# Altium PCB PWR_REG_LED_PCB.PcbDoc
Units mil, origin at the board's own origin, x right, y up, seen from the top; angles counter-clockwise.
Board outline 2700 x 2100 mil, 2 copper layers (Top Layer, Bottom Layer), stack 62.8 mil thick; 15 components, 31 nets, 62 pads, 18 vias.
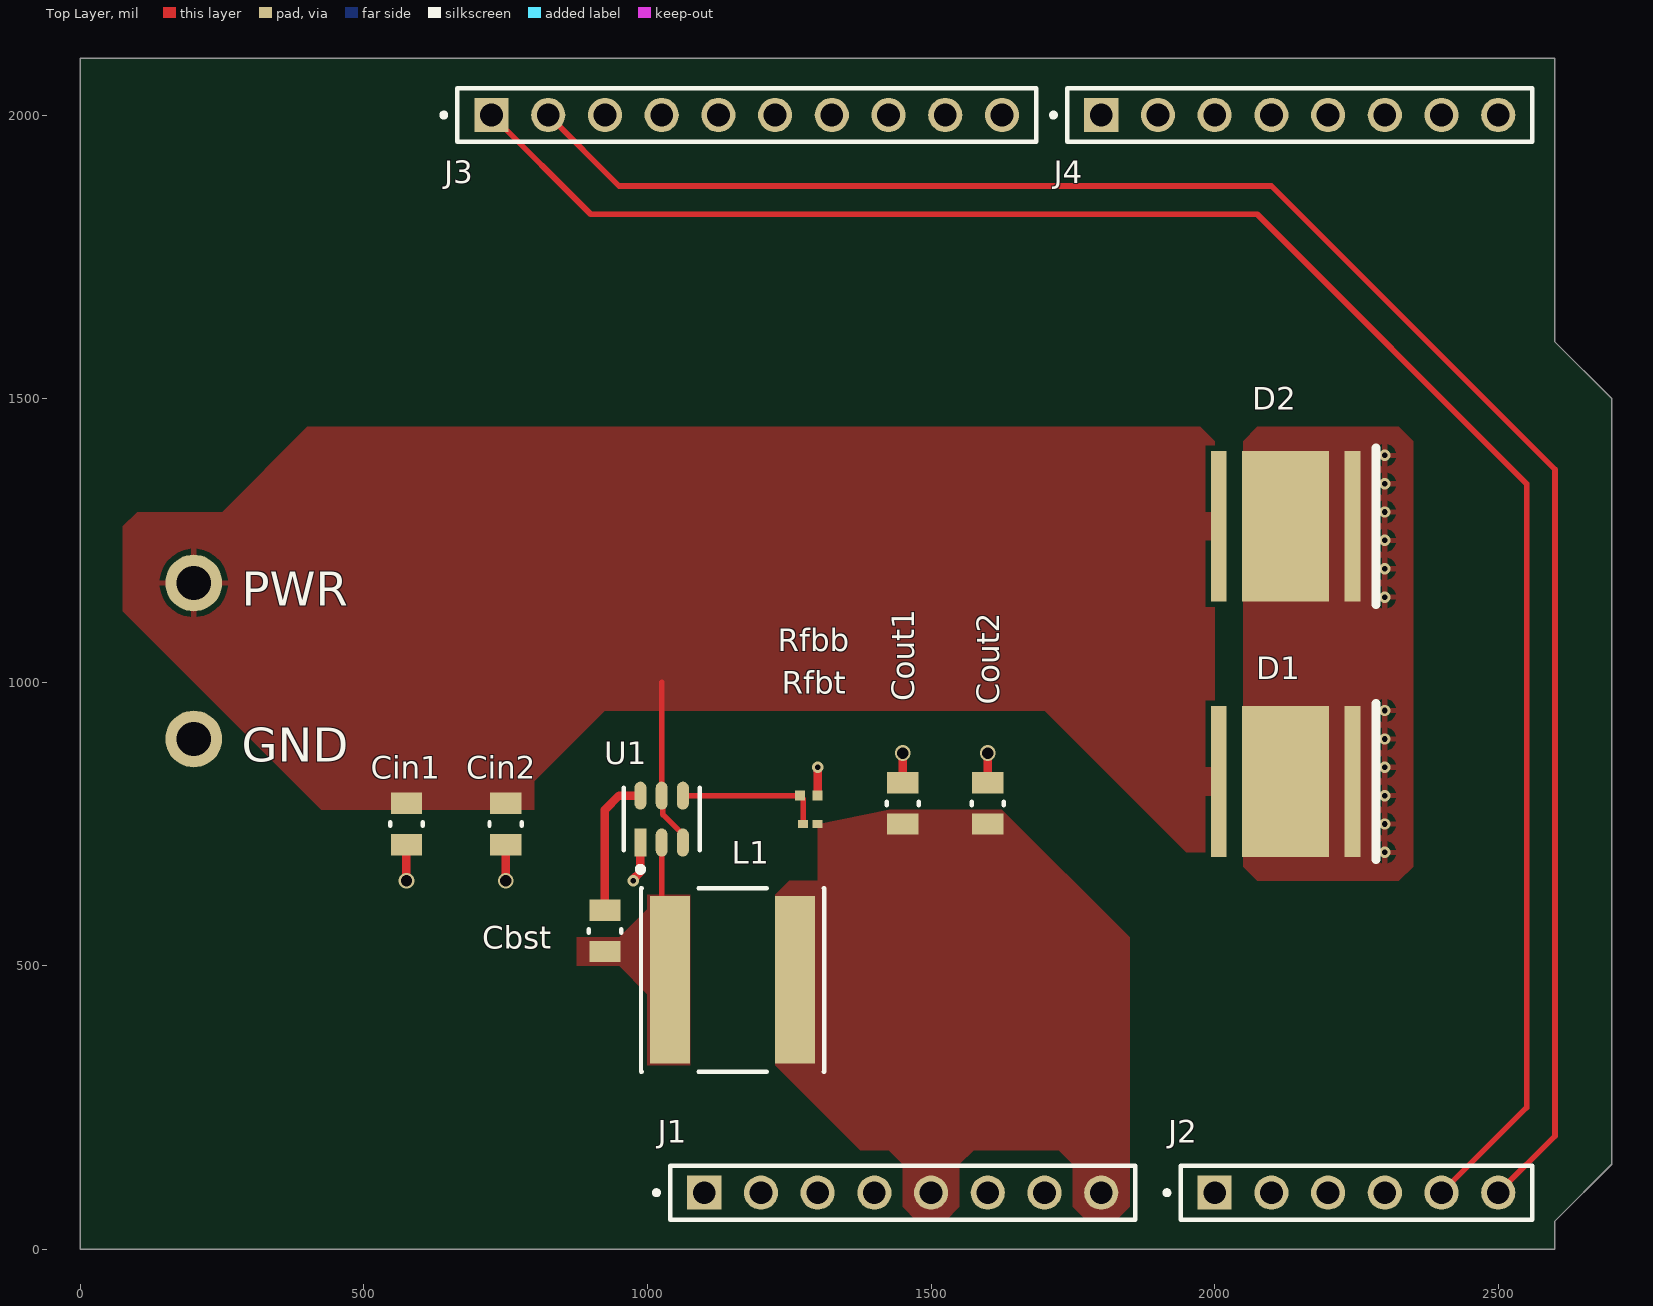
[diagram p0: Top Layer view]
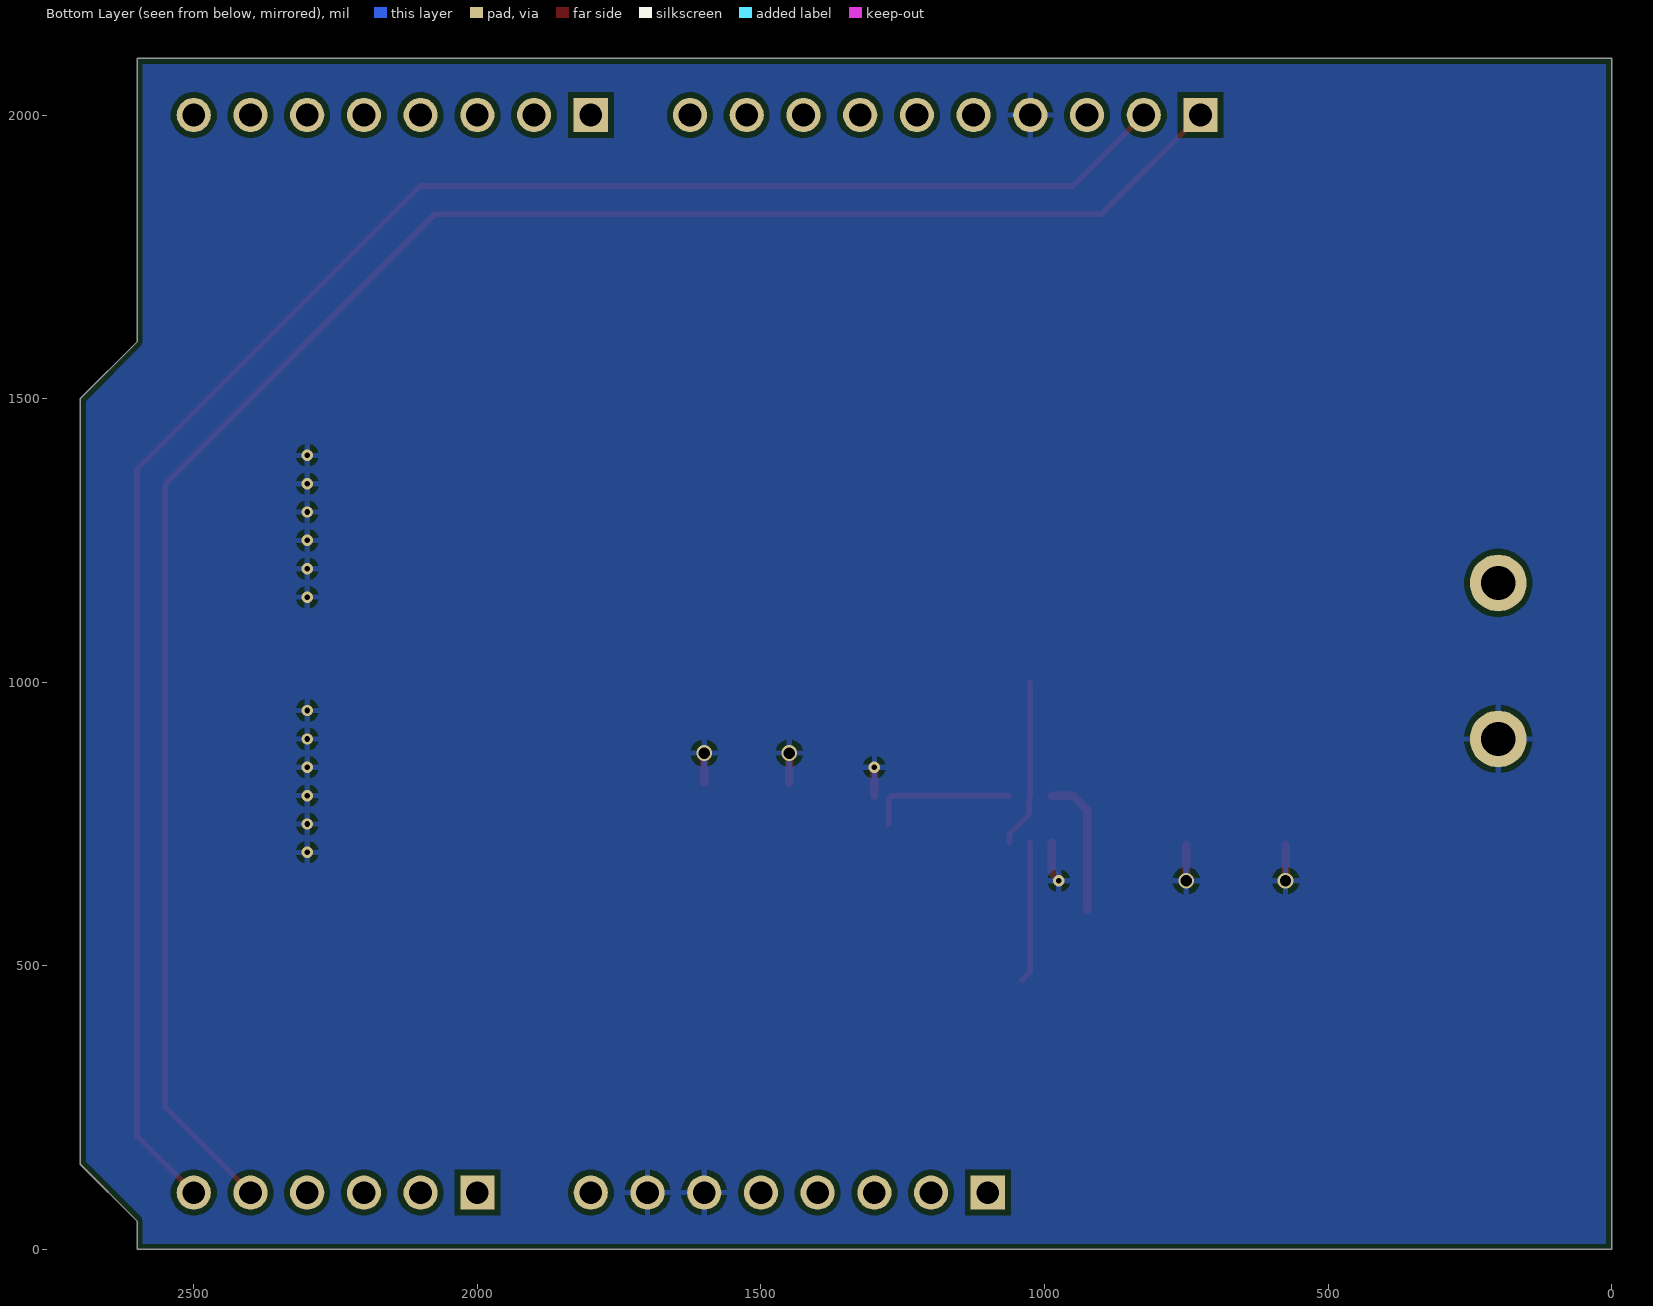
[diagram p1: Bottom Layer view, seen from below]
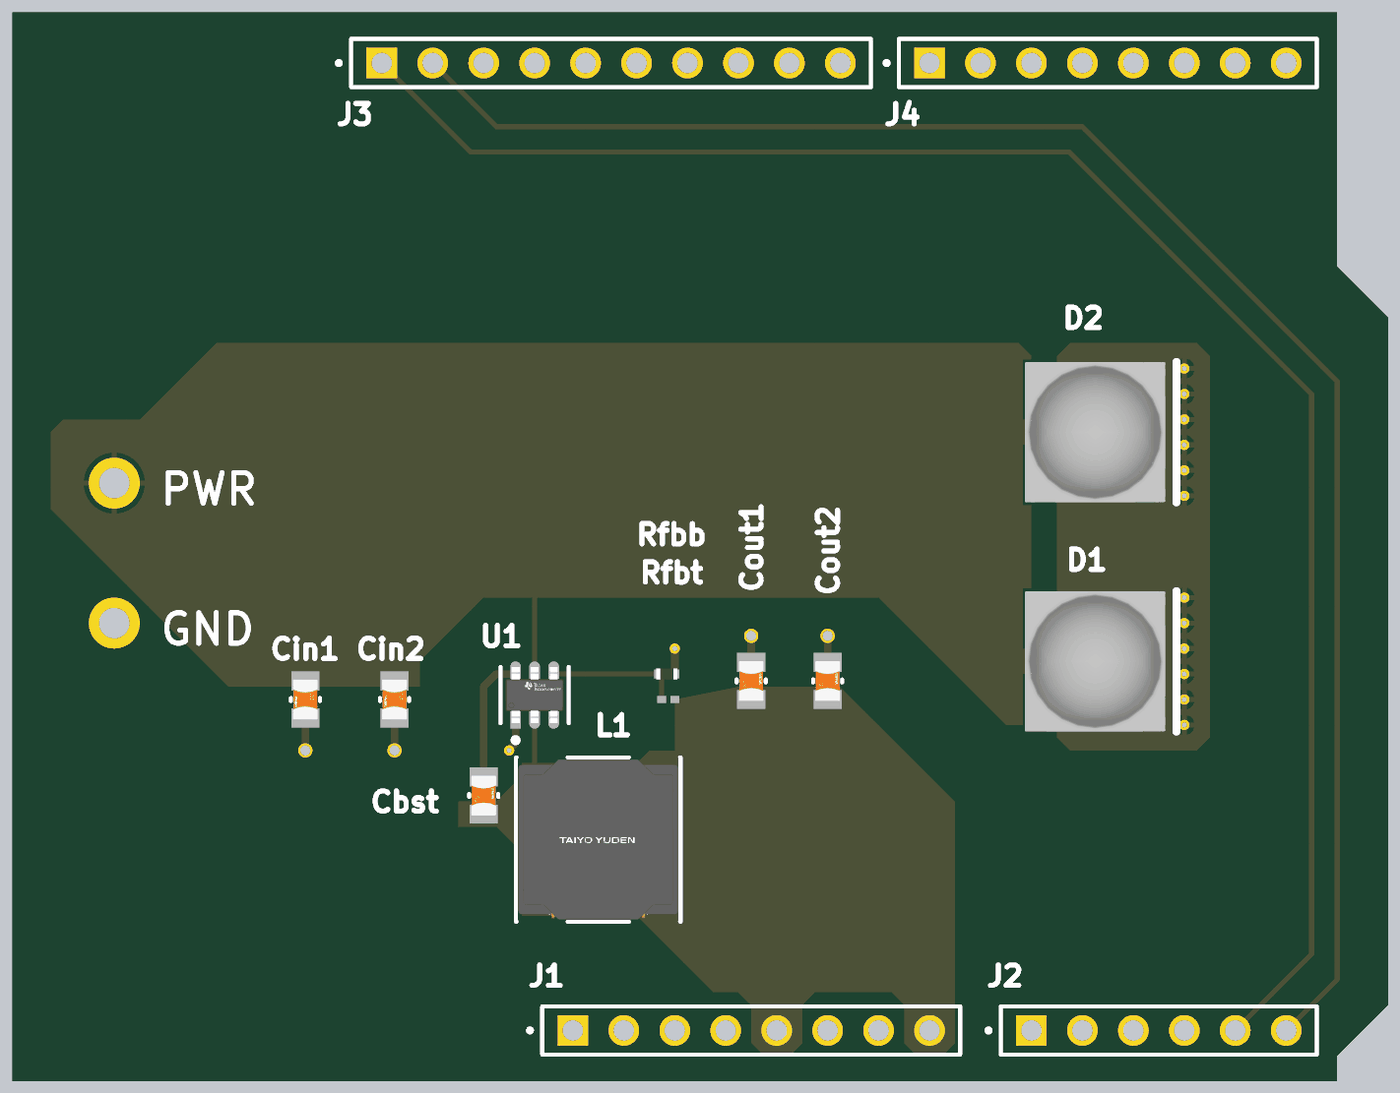
[diagram p2: 3D render of the assembled board from above, using the file's embedded part models]

## Layer stack, top to bottom
Top Solder: solder mask 0.4, Solder Resist, Dk 3.5
Top Layer: signal copper 1.4
Dielectric 1: dielectric 60, FR-4, Dk 4.8
Bottom Layer: signal copper 1.4
Bottom Solder: solder mask 0.4, Solder Resist, Dk 3.5

## Board outline
0,0 2600,0 2600,50 2700,150 2700,1500 2600,1600 2600,2100 0,2100

## Design rules (kind name [scope] priority, off if disabled: settings)
BoardOutlineClearance [All] p1: gap=10 ignorepadtopadclearanceinfootprint=FALSE
Clearance [All] p1: gap=10 ignorepadtopadclearanceinfootprint=TRUE
MinimumSolderMaskSliver [All] p1: minsoldermaskwidth=5
PolygonConnect [All] p1: connectstyle=Relief reliefconductorwidth=10 reliefentries=4 polygonreliefangle="90 Angle" airgapwidth=10
RoutingVias [All] p1: holewidth=10 width=18 viastyle="Through Hole" minholewidth=6 minwidth=14 maxholewidth=28 maxwidth=50
SolderMaskExpansion [All] p1: expansion=0 istentingtop=FALSE
Width [All] p1: maxlimit=30 minlimit=5 preferedwidth=10
29 further rules are at their usual default settings.

## Components (designator, comment, footprint, x,y, rotation, side; value= is the part's Value field where it differs from the comment)
Cbst "CC0805KRX7R8BB104" FP-CC0805-0_85-MFG 925,561.42 r90 top value="100 nF"
Cin1 "CC0805KRX7R8BB104" FP-CC0805-0_85-MFG 575,750 r270 top value="100 nF"
Cin2 "CC0805KRX7R8BB104" FP-CC0805-0_85-MFG 750,750 r270 top value="100 nF"
Cout1 "CC0805KRX7R8BB104" FP-CC0805-0_85-MFG 1450,786.42 r90 top value="100 nF"
Cout2 "CC0805KRX7R8BB104" FP-CC0805-0_85-MFG 1600,786.42 r90 top value="100 nF"
D1 "MKRAWT-00-0000-0D0HG235H" CREE-MK-R-2_V 2125,825 r0 top
D2 "MKRAWT-00-0000-0D0HG235H" CREE-MK-R-2_V 2125,1275 r0 top
J1 "8-Pin-Header" SAMTEC_SSQ-108-03-X-S 1450,100 r180 top
J2 "1x6 Header" SAMTEC_SSQ-106-03-X-S 2250,100 r180 top
J3 "10-Pin-Header" SAMTEC_SSQ-110-03-X-S 1175,2000 r180 top
J4 "8-Pin-Header" SAMTEC_SSQ-108-03-X-S 2150,2000 r180 top
L1 "NRS8030T3R3MJGJ" FP-NRS8030-MFG 1150,475 r0 top
Rfbb "ERJ2RKF1002X" RESC1005X40X25LL05T05 1284.25,800 r180 top
Rfbt "CRCW020156K2FNED" RESC0603X28X15NL05T05 1287.2,750 r0 top
U1 "TPS562201DDCR" FP-DDC0006A-IPC_C 1025,758.65 r90 top

## Footprints (in the part's own frame and the unit in brackets; to place one, negate y for a bottom-side part, rotate by r counter-clockwise, add the part's x,y. Pads: shape width x height; smd on the part's side, far side on the other; paste and mask are expansions set on the pad)
CREE-MK-R-2_V [mm] "SMD, 2-Leads, Body 7x7mm, Thermal Pad 3.9x6.76mm"
  rect 0.7x6.76 smd: 1(-3,0) 2(3,0)
  rect 3.9x6.76 smd: 3(0,0)
  silkscreen extent 4.05,-3.5 4.05,3.5, body extent -3.5,-3.5 3.5,3.5, height 4.1
FP-CC0805-0_85-MFG [mm]
  rect 0.95x1.4 smd paste+0 mask+0: 1(-0.925,0) 2(0.925,0)
  silkscreen extent -0.08,-0.72 0.08,0.72, body extent -1.6,-1.05 1.6,1.05, height 0.25
FP-DDC0006A-IPC_C [mm]
  rect 1.254x0.532 smd paste+0 mask+0: 1(-1.05,0.95)
  rrect100% 1.254x0.532 smd paste+0 mask+0: 2(-1.05,0) 3(-1.05,-0.95) 4(1.05,-0.95) 5(1.05,0) 6(1.05,0.95)
  silkscreen extent -2.37,-1.7 1.4,1.7, body extent -1.78,-1.55 1.78,1.55, height 0.25
FP-NRS8030-MFG [mm]
  rect 1.8x7.5 smd paste+0 mask+0: 1(-2.8,0) 2(2.8,0)
  silkscreen extent -4.1,-4.1 4.1,4.1, body extent -4.2,-4.2 4.2,4.2, height 0.25
RESC0603X28X15NL05T05 [mm] "Chip Resistor, 2-Leads, Body 0.60x0.30mm, IPC Medium Density"
  rect 0.45x0.35 smd: 1(-0.325,0) 2(0.325,0)
  body extent -0.33,-0.17 0.33,0.18, height 0.28
RESC1005X40X25LL05T05 [mm] "Chip Resistor, 2-Leads, Body 1.05x0.55mm, IPC High Density"
  rect 0.45x0.45 smd: 1(-0.4,0) 2(0.4,0)
  body extent -0.53,-0.28 0.53,0.28, height 0.4
SAMTEC_SSQ-106-03-X-S [mm]
  rect 1.53x1.53 hole 1.02: 01(6.35,0)
  round 1.53 hole 1.02: 02(3.81,0) 03(1.27,0) 04(-1.27,0) 05(-3.81,0) 06(-6.35,0)
  silkscreen extent -7.88,-1.2 8.59,1.2
SAMTEC_SSQ-108-03-X-S [mm]
  rect 1.53x1.53 hole 1.02: 01(8.89,0)
  round 1.53 hole 1.02: 02(6.35,0) 03(3.81,0) 04(1.27,0) 05(-1.27,0) 06(-3.81,0) 07(-6.35,0) 08(-8.89,0)
  silkscreen extent -10.42,-1.2 11.13,1.2
SAMTEC_SSQ-110-03-X-S [mm]
  rect 1.53x1.53 hole 1.02: 01(11.43,0)
  round 1.53 hole 1.02: 02(8.89,0) 03(6.35,0) 04(3.81,0) 05(1.27,0) 06(-1.27,0) 07(-3.81,0) 08(-6.35,0) 09(-8.89,0) 10(-11.43,0)
  silkscreen extent -12.96,-1.2 13.67,1.2

## Part data
Cbst Cin1 Cin2 Cout1 Cout2: library part CMP-1036-04410-2, "CAP CER 0.1UF 25V X7R 0805", Capacitance="100 nF", Manufacturer=Yageo, Package=CC0805-0.85, Temperature="-30°C to +85°C", Temperature Characteristic=X7R, Temperature Range High=+85°C, Temperature Range Low=-30°C, Tolerance=0.1, Voltage Rating="25 V", Automotive=No, Category=Cap, ComponentLink2Description=Datasheet, ComponentLink2URL=http://www.yageo.com/documents/recent/UPY-GPHC_Y5V_6.3V-to-50V_8.pdf, Device Class L1="Passive Components", Device Class L2=Capacitors, Device Class L3="Ceramic Capacitors", Digikey Description="CAP CER 0.1UF 25V X7R 0805", Footprint Url=http://www.yageo.com/exep/pages/download/literatures/UPY-C_GEN_24.pdf, Height=0.95mm, Ipc Land Pattern Name=CAPC200125X85, Lead Free=Yes, Manufacturer Part Number=CC0805KRX7R8BB104, Material=Ceramic, Mouser Description="Multilayer Ceramic Capacitors MLCC - SMD/SMT 100nF 25V X7R 10%", Octopart=https://octopart.com/cc0805krx7r8bb104-yageo-39467766, RoHS=TRUE
D1 D2: library part CMP-2100-00977-1, "LED, White, 12 V, 2-Pin SMD, RoHS, Tape and Reel"
J1 J4: library part SSQ-108-03-X-S, "8 Position Receptacle Connector Through Hole, Right Angle", Package=None, Availability=Bad, Check_prices=https://www.snapeda.com/parts/SSQ-108-03-L-S/Samtec/view-part/3352745/?ref=eda, MF=Samtec, MP=SSQ-108-03-L-S, Price=None, Purchase-URL=https://pricing.snapeda.com/search/part/SSQ-108-03-L-S/?ref=eda, SnapEDA_Link=https://www.snapeda.com/parts/SSQ-108-03-L-S/Samtec/view-part/3352745/?ref=snap
J2: library part SSQ-106-03-X-S, "6 Position Receptacle Connector Through Hole", Package=None, Availability=Bad, Check_prices=https://www.snapeda.com/parts/SSQ-106-03-L-S/Samtec/view-part/3331053/?ref=eda, MF=Samtec, MP=SSQ-106-03-L-S, Price=None, Purchase-URL=https://pricing.snapeda.com/search/part/SSQ-106-03-L-S/?ref=eda, SnapEDA_Link=https://www.snapeda.com/parts/SSQ-106-03-L-S/Samtec/view-part/3331053/?ref=snap
J3: library part SSQ-110-03-X-S, "10 Position Receptacle Connector Through Hole, Right Angle", Package=None, Availability=Bad, Check_prices=https://www.snapeda.com/parts/SSQ-110-03-L-S/Samtec/view-part/3589021/?ref=eda, MF=Samtec, MP=SSQ-110-03-L-S, Price=None, Purchase-URL=https://pricing.snapeda.com/search/part/SSQ-110-03-L-S/?ref=eda, SnapEDA_Link=https://www.snapeda.com/parts/SSQ-110-03-L-S/Samtec/view-part/3589021/?ref=snap
L1: library part CMP-14484-000405-1, "Inductor Power Shielded Wirewound 3.3uH 20% 100KHz Ferrite 4.2A 24.7mΩ DCR T/R", Case/Package=Nonstandard, Current Rating=4.3A, DC Resistance (DCR)=19mR, Inductance=3.3uH, Inductance Tolerance=20%, Max DC Current=4.2A, Max Operating Temperature=125°C, Min Operating Temperature=-25°C, Package Quantity=1000, Resistor Type=Wirewound, Self Resonant Frequency=50MHz, Test Frequency=100kHz, Core Material=Ferrite, Depth=8.2mm, Halogen Free="Halogen Free", Height=3mm, Height - Seated (Max)=0.118inch, Lead Free="Lead Free", Lead Pitch=5.6mm, Length=8mm, Mount="Surface Mount", Number of Pins=2, Packaging="Tape and Reel", Radiation Hardening=No, REACH SVHC="No SVHC", RMS Current (Irms)=4.3A, RoHS Compliant=Yes, Saturation Current=4.2A, Series=NRS, Shielding=Shielded, Termination=SMD/SMT, Tolerance=20%, Width=0.315inch
Rfbb: library part CMP-2000-07588-1, "Chip Resistor, 10 KOhm, +/- 1%, 0.1 W, -55 to 155 degC, 0402 (1005 Metric), RoHS, Tape and Reel", Case Code (Imperial)=0402, Case Code (Metric)=1005, Manufacturer=Panasonic, Max Operating Temperature=155degC, Max Power Dissipation=100mW, Min Operating Temperature=-55degC, Package Description="2-Pin Surface Mount Device, Body 1 x 0.5 mm", Package Quantity=1, Package Reference=402, Resistance=10KOhm, Temperature Coefficient=100ppm\/degreesC, Tolerance=1%, Voltage Rating=50V, Case\/Package=0402, Composition=ThickFilm, Contact Plating=Tin, Datasheet URL=https://industrial.panasonic.com/cdbs/www-data/pdf/RDA0000/AOA0000C304.pdf, Datasheet Version=02/2017, Depth=0.5mm, Height=0.35mm, Lead Free=LeadFree, Length=1mm, Manufacturer URL=http://www.panasonic.com/, Military Standard=Not, Mount=SurfaceMount, Mounting Technology=SurfaceMount, Number of Pins=2, Number of Terminations=2, Packaging=TapeandReel, Power Rating=100mW, Radiation Hardening=No, REACH SVHC=NoSVHC, RoHSCompliant=True, Termination=SMD/SMT, Voltage Rating (DC)=50V, Width=0.02inch
Rfbt: library part CMP-2004-00723-1, Manufacturer="Vishay Dale", Part Number=CRCW020156K2FNED
U1: library part CMP-04918-000361-1, "IC REG BUCK ADJ 2A TSOT23-6", Case/Package=SOT, Max Input Voltage=17V, Max Operating Temperature=125°C, Max Output Current=2A, Min Input Voltage=4.5V, Min Operating Temperature=-40°C, Output Voltage=7V, Quiescent Current=400uA, Switching Frequency=580kHz, Contact Plating=Tin, Lead Free="Lead Free", Mount="Surface Mount", Number of Outputs=1, Number of Pins=6, Operating Supply Voltage=17V, Output Type=Adjustable, RoHS Compliant=Yes

## Free pads (board coordinates)
  round 100 hole 60: 1(200,1175) 2(200,900)

## Via types
v1: diameter 20, hole 10, Top Layer to Bottom Layer, 14 vias
v2: diameter 28, hole 20, Top Layer to Bottom Layer, 4 vias

## Nets (pads, with @x,y where several pads share a name; then routed paths per layer and width w, separated by ;. In a path a pad name is that pad's centre, name@x,y a point inside that pad or via, vN(x,y) a via of type N, cw(c..) or ccw(c..) an arc to the next point about the centre after c; other vN are vias at no path point)
3.3V: J1.04
+5: Cout1.1 Cout2.1 J1.05 J1.08 L1.2 Rfbt.2
+12: Cin1.1 Cin2.1 D1.1 D2.1 pad.1 U1.3 U1.5 | length 298.2
  Top Layer w10: 1025,1000 U1.5 1027.1,797.9 1027.1,766.82 1062.4,731.52 U1.3
A0: J2.01
A1: J2.02
A2: J2.03
A3: J2.04
A4: J2.05 J3.01 | length 3406.4
  Top Layer w10: J3.01 900,1825 2075,1825 2550,1350 2550,250 J2.05
A5: J2.06 J3.02 | length 3350.3
  Top Layer w10: J3.02 950,1875 2100,1875 2600,1375 2600,200 J2.06
AREF: J3.03
D0: J4.08
D1: J4.07
D2: J4.06
D3: J4.05
D4: J4.04
D5: J4.03
D6: J4.02
D7: J4.01
D8: J3.10
D9: J3.09
D10: J3.08
D11: J3.07
D12: J3.06
D13: J3.05
GND: Cin1.2 Cin2.2 Cout1.2 Cout2.2 D1.2 D1.3 D2.2 D2.3 J1.06 J1.07 J3.04 pad.2 Rfbb.1 U1.1 | length 354
  Top Layer w10: v1(975,650) v1@975,652.71
  Top Layer w15: v2(575,650) Cin1.2 ; v2(750,650) Cin2.2 ; v1@975,652.71 987.6,665.3 U1.1 ; Rfbb.1 v1(1300,850) ; Cout1.2 v2(1450,875) ; Cout2.2 v2(1600,875)
  other v1: 2300,700 2300,750 2300,800 2300,850 2300,900 2300,950 2300,1150 2300,1200 2300,1250 2300,1300 2300,1350 2300,1400
IOREF: J1.02
N-C: J1.01
NetCbst_2: Cbst.2 U1.6 | length 250.1
  Top Layer w15: Cbst.2 925,775 950,800 U1.6
NetRfbt_1: Rfbb.2 Rfbt.1 U1.4 | length 258.5
  Top Layer w10: U1.4 Rfbb.2 1274.41,794.09 Rfbt.1
RESET: J1.03
SW_Out: Cbst.1 L1.1 U1.2 | length 248.4
  Top Layer w10: U1.2 1025,489.76 L1.1

## Polygon pours and split planes (outlines as drawn)
GND on Bottom Layer "GND_L02_P000" (solid, pour order 0): 2600,50 2700,150 2700,1500 2600,1600 2600,2100 0,2100 0,0 2600,-25
+12 on Top Layer "+12_L01_P005" (solid, pour order 5): 2000,700 2000,1425 1975,1450 400,1450 250,1300 100,1300 75,1275 75,1125 425,775 800,775 800,825 925,950 1700,950 1950,700
SW_Out on Top Layer "SW_OUT_L01_P004" (solid, pour order 4): 1075,625 1075,325 1000,325 1000,450 950,500 875,500 875,550 950,550 1000,600 1000,625
+5 on Top Layer "+5_L01_P002" (solid, pour order 2): 1475,50 1450,75 1450,150 1425,175 1375,175 1225,325 1225,625 1250,650 1300,650 1300,750 1425,775 1625,775 1850,550 1850,75 1825,50 1775,50 1750,75 1750,150 1725,175 1575,175 1550,150 1550,75 1525,50
GND on Top Layer "GND_L01_P001" (solid, pour order 1): 2050,1425 2050,675 2075,650 2325,650 2350,675 2350,1425 2325,1450 2075,1450

## Silkscreen, mask and mechanical layers (free items; w line width, h text height)
Top Overlay:
  text "PWR" at 285,1135 h60
  text "GND" at 285,860 h60